# EAGLE board ModuleCarrier-xDot (EAGLE 7.7.0)
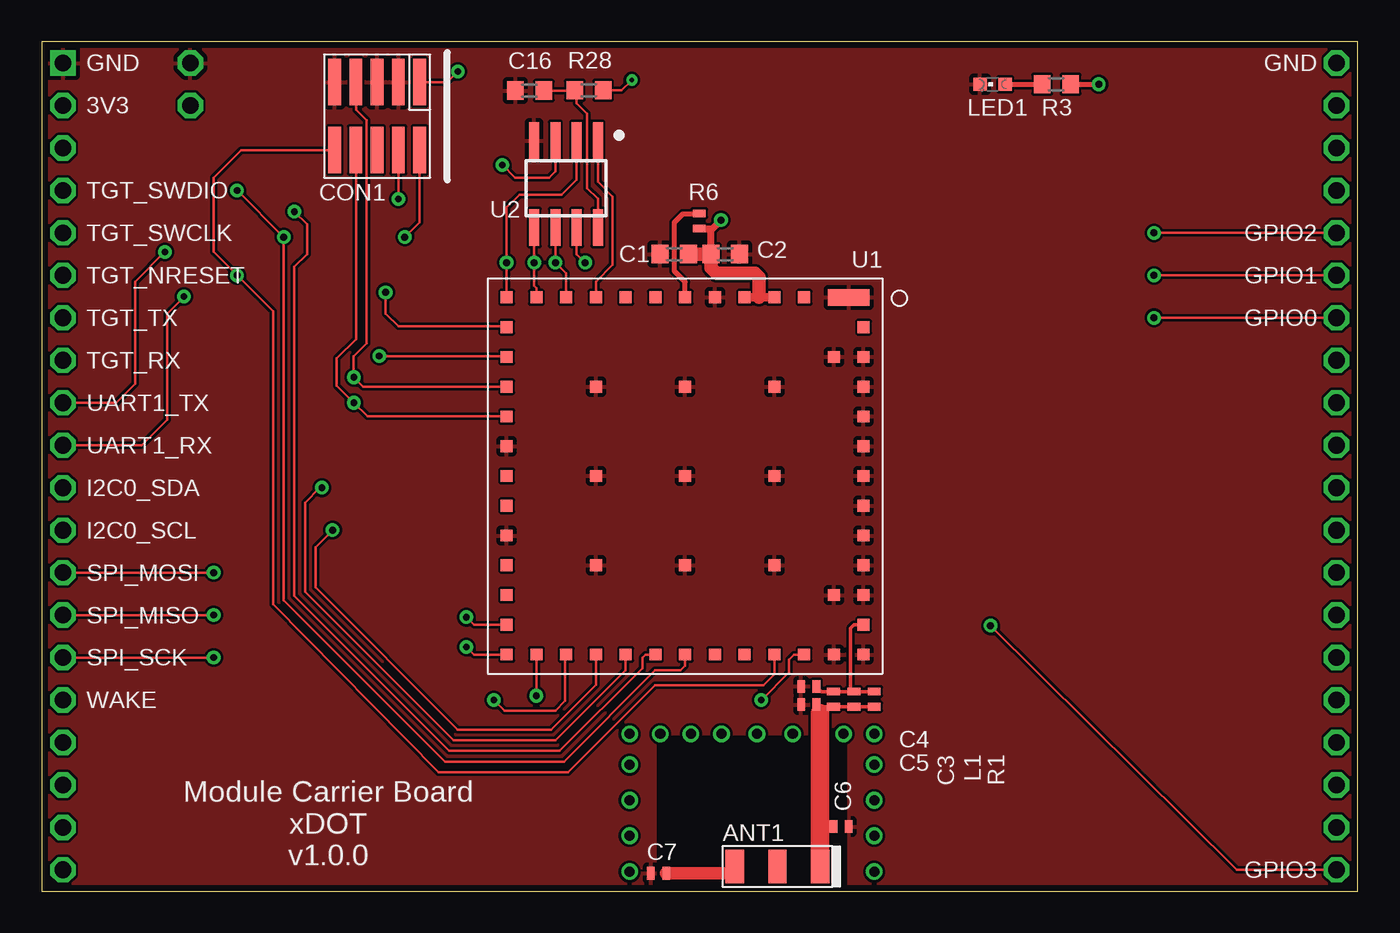
[diagram p0: board, top side]
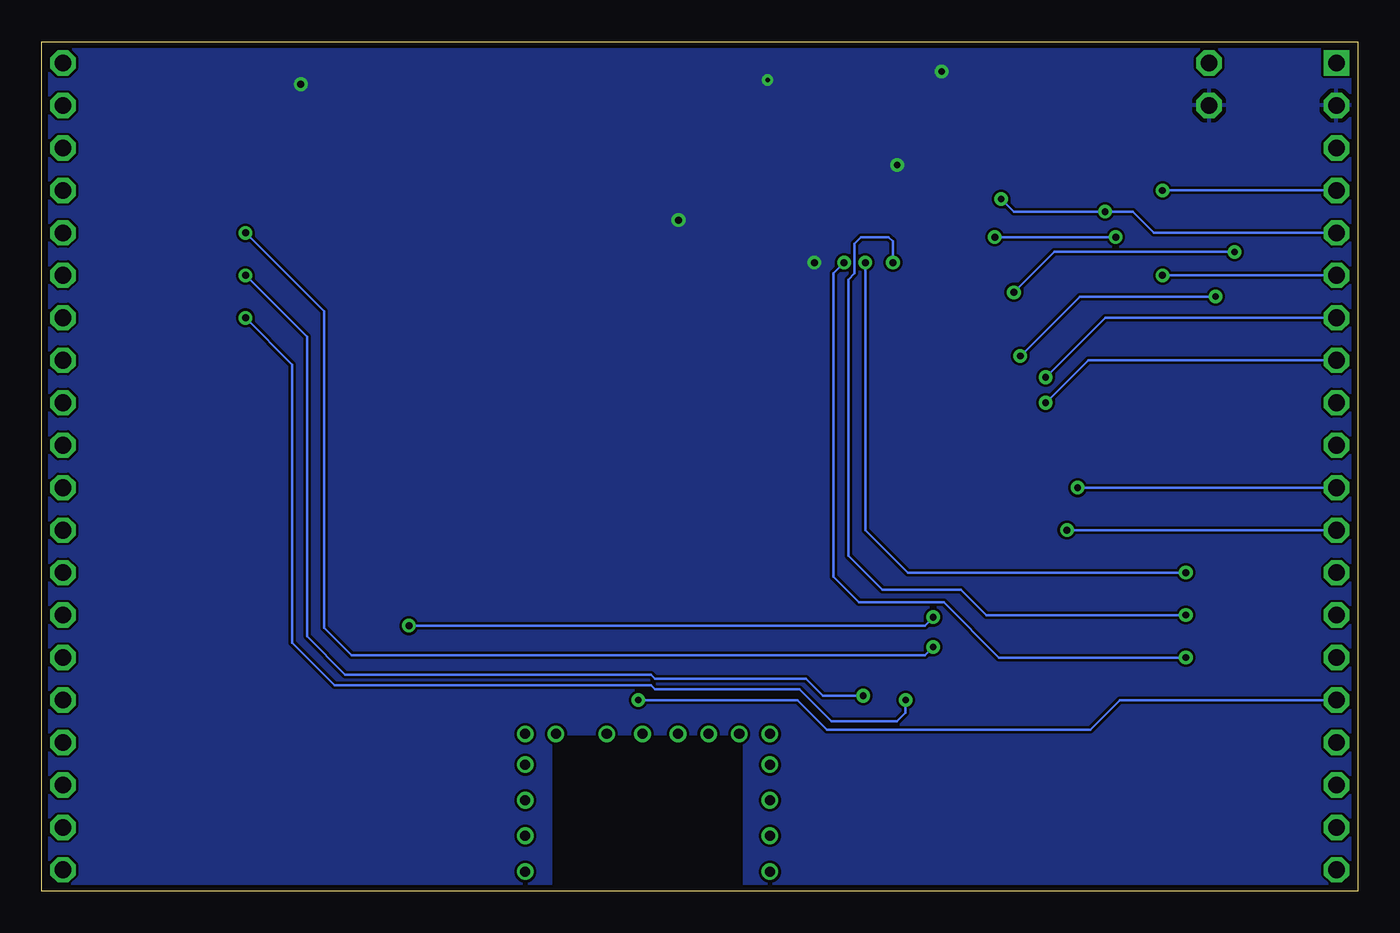
[diagram p1: board, bottom side, seen from below]

Size 78.74 x 50.8 mm. Coordinates in mm from the lower left corner, seen from the top.
Copper layers ((1*16)): Top 0.035mm / dielectric 0.8mm / Bottom 0.035mm
Design rules "mbed-HDK-6-6-2-layer": minimum track width 6mil, minimum drill 9mil, track to track 6mil, track to pad 6mil, pad to pad 6mil, via to via 6mil, smd to smd 6mil, copper to edge 15mil, drill to drill 8mil, minimum pad ring 10mil, minimum via ring 8mil, stop-mask expansion 4mil, vias tented up to drill 0mil, thermal gap 10mil
tRestrict: area 36.8,0.2 to 48.2,9.3
bRestrict: area 36.8,0.2 to 48.2,9.3

## Footprints (pad centres in the part's own frame; a part is rotated, then mirrored left to right if it is on the bottom)
M620720 = smd 1.1 x 2: P$1 -2.55,0; P$2 0,0; P$3 2.55,0
0603 = smd 1 x 1.1: 1 -0.85,0; 2 0.85,0
0402 = smd 0.457 x 0.762: 1 -0.457,0; 2 0.457,0
FTSH-105-02 = smd 0.762 x 2.794: 1 0.381,-2.032; 2 0.381,2.032; 3 1.651,-2.032; 4 1.651,2.032; 5 2.921,-2.032; 6 2.921,2.032; 7 4.191,-2.032; 8 4.191,2.032; 9 5.461,-2.032; 10 5.461,2.032
CHIPLED_0603 = smd 0.8 x 0.8: A 0,-0.75; C 0,0.75
TP50-PTH = drill 1 octagon: TP 0,0
MTXDOT-EU1/NA1-A00-1 = smd 0.97 x 2.49: P$1 0,0 | smd 0.71 x 0.71: P$2 0,-2.67; P$3 0,-4.45; P$4 0,-6.23; P$5 0,-8.01; P$6 0,-9.79; P$7 0,-11.57; P$8 0,-13.35; P$9 0,-15.13; P$10 0,-16.91; P$11 0,-18.69; P$12 0,-20.47; P$13 1.78,-20.47; P$14 3.56,-20.47; P$15 5.34,-20.47; P$16 7.12,-20.47; P$17 8.9,-20.47; P$18 10.68,-20.47; P$19 12.46,-20.47; P$20 14.24,-20.47; P$21 16.02,-20.47; P$22 17.8,-20.47; P$23 19.58,-20.47; P$24 21.36,-20.47; P$25 21.36,-18.69; P$26 21.36,-16.91; P$27 21.36,-15.13; P$28 21.36,-13.35; P$29 21.36,-11.57; P$30 21.36,-9.79; P$31 21.36,-8.01; P$32 21.36,-6.23; P$33 21.36,-4.45; P$34 21.36,-2.67; P$35 21.36,-0.89; P$36 21.36,0.89; P$37 19.58,0.89; P$38 17.8,0.89; P$39 16.02,0.89; P$40 14.24,0.89; P$41 12.46,0.89; P$42 10.68,0.89; P$43 8.9,0.89; P$44 7.12,0.89; P$45 5.34,0.89; P$46 3.56,0.89; P$47 1.78,0.89; P$48 17.8,-0.89; P$49 3.56,-0.89; P$50 5.34,-4.45; P$51 10.68,-4.45; P$52 16.02,-4.45; P$53 5.34,-9.79; P$54 10.68,-9.79; P$55 16.02,-9.79; P$56 5.34,-15.13; P$57 10.68,-15.13; P$58 16.02,-15.13
SO8 = smd 0.6 x 2.2: 1 -1.905,-2.6; 2 -0.635,-2.6; 3 0.635,-2.6; 4 1.905,-2.6; 5 1.905,2.6; 6 0.635,2.6; 7 -0.635,2.6; 8 -1.905,2.6
MODULE_DAUGHTER = drill 1 square: 1 0,0 | drill 1 octagon: 2 0,-2.54; 3 0,-5.08; 4 0,-7.62; 5 0,-10.16; 6 0,-12.7; 7 0,-15.24; 8 0,-17.78; 9 0,-20.32; 10 0,-22.86; 11 0,-25.4; 12 0,-27.94; 13 0,-30.48; 14 0,-33.02; 15 0,-35.56; 16 0,-38.1; 17 0,-40.64; 18 0,-43.18; 19 0,-45.72; 20 0,-48.26; 21 76.2,-48.26; 22 76.2,-45.72; 23 76.2,-43.18; 24 76.2,-40.64; 25 76.2,-38.1; 26 76.2,-35.56; 27 76.2,-33.02; 28 76.2,-30.48; 29 76.2,-27.94; 30 76.2,-25.4; 31 76.2,-22.86; 32 76.2,-20.32; 33 76.2,-17.78; 34 76.2,-15.24; 35 76.2,-12.7; 36 76.2,-10.16; 37 76.2,-7.62; 38 76.2,-5.08; 39 76.2,-2.54; 40 76.2,0

## Placement (x,y rotation side)
ANT1  M620720  [M620720]  44.02,1.47 180 top
C1  10uF  [0603]  37.85,38.1 180 top
C2  100nF  [0603]  40.89,38.1 0 top
C3  9.1pF  [0402]  47.37,11.48 270 top
C4  5.6pF  [0402]  45.9,12.24 0 top
C5  10pF  [0402]  45.9,11.16 0 top
C6  82pF  [0402]  47.83,3.86 180 top
C7  6.8pF  [0402]  36.91,1.07 0 top
C16  100nF  [0603]  29.18,47.88 0 top
CON1  SWD-10/TC2050_SMD  [FTSH-105-02]  22.99,46.36 180 top
L1  7.5nH  [0402]  48.59,11.48 270 top
LED1  SMD_LED0603  [CHIPLED_0603]  56.9,48.26 90 top
R1  0  [0402]  49.81,11.48 270 top
R3  1.5K  [0603]  60.71,48.26 0 top
R6  0  [0402]  39.34,40.08 90 top
R28  0  [0603]  32.74,47.9 0 top
TP1  TEST-POINT-50R-PTH  [TP50-PTH]  8.89,46.99 0 top
TP2  TEST-POINT-50R-PTH  [TP50-PTH]  8.89,49.53 0 top
U1  MTXDOT-EU1-A00-1  [MTXDOT-EU1/NA1-A00-1]  48.29,35.51 270 top
U2  MX25R3235FM1IH0  [SO8]  31.37,42.29 180 top
U$1  MODULE_DAUGHTER  [MODULE_DAUGHTER]  1.27,49.53 0 top

## Library data of the parts
ANT1 = mbed-HDK-RF; MF: Ethertronics; MFN: M620720; OC-DIGIKEY: 939-1066-1-ND
C1-C7 C16 L1 R1 R3 R6 R28 = mbed-HDK-RLCQ
CON1 = mbed-HDK-Connector
LED1 = mbed-HDK-Optical; MF: Wurth Electronics Inc; MFN: 150060RS75000; OC-DIGIKEY: 732-4978-1-ND; OC-MOUSER: 710-150060RS75000; OC-NEWARK: 2322071
TP1 TP2 = mbed-HDK
U1 = mbed-HDK-MF-MULTITECH; MF: Multi-Tech Systems Inc.; MFN: MTXDOT-EU1-A00-1; OC-DIGIKEY: 591-1292-ND
U2 = mbed-HDK-IC; MF: Macronix; MFN: MX25R3235FM2IH0; OC-DIGIKEY: 1092-1174-ND
U$1 = blackbriar

## Nets
+3.3V_TGT: C1.1 C2.1 CON1.1 R3.2 R6.1 R28.2 TP1.TP U1.P$3 U1.P$4 U2.3 U2.7 U$1.2
ANT1: C3.1 C4.2 L1.1 R1.1 U1.P$37
GND: C1.2 C2.2 C4.1 C5.1 C6.1 C7.1 C16.1 CON1.3 CON1.5 CON1.9 LED1.C TP2.TP U1.P$1 U1.P$5 U1.P$17 U1.P$20 U1.P$35 U1.P$36 U1.P$38 U1.P$39 U1.P$40 U1.P$41 U1.P$42 U1.P$43 U1.P$44 U1.P$45 U1.P$46 U1.P$48 U1.P$49 U1.P$50 U1.P$51 U1.P$52 U1.P$53 U1.P$54 U1.P$55 U1.P$56 U1.P$57 U1.P$58 U2.4 U$1.1
GPIO0: U1.P$26 U$1.34
GPIO1: U1.P$25 U$1.35
GPIO2: U1.P$24 U$1.36
GPIO3: U1.P$23 U$1.21
I2C0_SCL: U1.P$27 U$1.12
I2C0_SDA: U1.P$28 U$1.11
N$1: ANT1.P$3 C7.2
N$2: LED1.A R3.1
N$4: ANT1.P$1 C3.2 C5.2 C6.2 L1.2 R1.2
N$48: C16.2 R28.1 U2.8
RFU1: U1.P$2
RFU2: R6.2 U1.P$6
RFU3: U1.P$7
RFU4: U1.P$8
RFU5: U1.P$18
RFU6: U1.P$19
RFU7: U1.P$21
RFU8: U1.P$22
SPI_MISO: U1.P$12 U2.2 U$1.14
SPI_MOSI: U1.P$11 U2.5 U$1.13
SPI_NSS: U1.P$9 U2.1
SPI_SCK: U1.P$10 U2.6 U$1.15
TGT_NRESET: CON1.10 U1.P$33 U$1.6
TGT_RX: CON1.8 U1.P$16 U$1.8
TGT_SWCLK: CON1.4 U1.P$29 U$1.5
TGT_SWDIO: CON1.2 U1.P$30 U$1.4
TGT_TX: CON1.7 U1.P$15 U$1.7
UART1_CTS: U1.P$32
UART1_RTS: U1.P$31
UART1_RX: U1.P$14 U$1.10
UART1_TX: U1.P$13 U$1.9
WAKE: U1.P$34 U$1.16

## Tracks (layer width: path | path; a pad name or v marks a point on that pad's centre or on a via)
+3.3V_TGT  (via drill 0.25, 0.41)
  Top 0.152: R28.2 34.7,47.9 v35.31,48.51 | CON1.1 24.26,48.39 v24.89,49.02 | U2.7 32,38.1 v32.51,37.59 | U2.3 30.73,43.05 30.35,42.67 28.32,42.67 v27.56,43.43
  Top 0.305: R3.2 v63.25,48.26
  Top 0.406: R6.1 40.13,39.62 | 40.13,39.62 v40.64,40.13 | C2.1 40.04,39.54 40.13,39.62
  Top 0.508: U1.P$4 42.93,35.51 U1.P$3
  Top 0.813: C1.1 C2.1 40.04,37.3 40.39,36.96 42.67,36.96 42.93,36.7 42.93,35.51
  pour Bottom: 78.74,50.8 0,50.8 0,0 78.74,0
ANT1
  Top 0.203: R1.1 L1.1 | L1.1 C3.1 46.66,11.94 C4.2 | U1.P$37 48.59,15.93 48.39,15.72 48.39,12.14 L1.1
GND
  pour Top: 78.74,50.8 0,50.8 0,0 78.74,0
GPIO0  (via drill 0.41)
  Top 0.152: U1.P$26 31.32,14.21 31.32,11.38 30.73,10.8 27.69,10.8 v27.05,11.43 | v66.55,34.29 U$1.34
  Bottom 0.152: v27.05,11.43 27.05,10.67 27.56,10.16 31.5,10.16 33.4,12.06 42.04,12.06 42.29,12.32 61.21,12.32 63.75,14.86 63.75,31.5 v66.55,34.29
GPIO1  (via drill 0.41)
  Top 0.152: v66.55,36.83 U$1.35 | U1.P$25 v29.59,11.69 v29.59,11.68
  Bottom 0.152: v29.59,11.68 32,11.68 33.02,12.7 42.04,12.7 42.29,12.95 60.58,12.95 62.87,15.24 62.87,33.15 v66.55,36.83
GPIO2  (via drill 0.41)
  Top 0.152: U1.P$24 25.86,14.15 v25.4,14.61 | v66.55,39.37 U$1.36
  Bottom 0.152: v25.4,14.61 25.91,14.1 60.2,14.1 61.85,15.75 61.85,34.67 v66.55,39.37
GPIO3  (via drill 0.41)
  Top 0.152: U1.P$23 25.85,15.93 v25.4,16.38 | v56.77,15.88 71.5,1.27 U$1.21
  Bottom 0.152: v56.77,15.88 25.91,15.88 v25.4,16.38
I2C0_SCL  (via drill 0.41)
  Top 0.152: U1.P$27 33.16,12.33 30.48,9.65 24.89,9.65 16.38,18.16 16.38,20.57 v17.4,21.59
  Bottom 0.152: v17.4,21.59 U$1.12
I2C0_SDA  (via drill 0.41)
  Top 0.152: U1.P$28 34.94,13.22 30.73,9.02 24.64,9.02 15.75,17.91 15.75,23.24 16.64,24.13 v16.76,24.13
  Bottom 0.152: v16.76,24.13 U$1.11
N$1
  Top 0.762: C7.2 41.06,1.07 ANT1.P$3
N$2
  Top 0.305: LED1.A R3.1
N$3  (via drill 0.6)
  other vias: 49.81,1.17
N$4
  Top 0.203: R1.2 L1.2 C3.2 46.56,11.02 C5.2 46.36,10.61 46.57,10.64 | C6.2 47.32,3.81 47.17,3.81
  Top 0.508: 47.17,3.81 46.97,4.01 46.56,4.01
  Top 1.1: ANT1.P$1 46.56,1.48 46.56,4.01 46.57,10.64
N$5  (via drill 0.6)
  other vias: 49.81,3.3
N$6  (via drill 0.6)
  other vias: 49.81,5.44
N$7  (via drill 0.6)
  other vias: 49.81,7.57
N$8  (via drill 0.6)
  other vias: 49.81,9.4
N$9  (via drill 0.6)
  other vias: 47.98,9.4
N$10  (via drill 0.6)
  other vias: 44.93,9.4
N$11  (via drill 0.6)
  other vias: 42.8,9.4
N$12  (via drill 0.6)
  other vias: 40.67,9.4
N$13  (via drill 0.6)
  other vias: 38.84,9.4
N$14  (via drill 0.6)
  other vias: 37.01,9.4
N$15  (via drill 0.6)
  other vias: 35.18,9.4
N$16  (via drill 0.6)
  other vias: 35.18,7.57
N$17  (via drill 0.6)
  other vias: 35.18,5.44
N$18  (via drill 0.6)
  other vias: 35.18,3.3
N$19  (via drill 0.6)
  other vias: 35.18,1.17
N$48
  Top 0.152: C16.2 31.86,47.88 R28.1 32,47.79 32,47.12 32.64,46.48 32.64,42.04 33.27,41.4 U2.8
RFU2
  Top 0.305: U1.P$6 38.5,36.44 37.85,37.08 37.85,40.01 38.35,40.51 39.32,40.51 R6.2
SPI_MISO  (via drill 0.41)
  Top 0.152: U1.P$12 v27.82,37.59 v27.81,37.59 v27.82,37.59 27.82,40.9 28.57,41.66 31.11,41.66 32,42.55 U2.2 | v10.29,16.51 U$1.14
  Bottom 0.152: v27.81,37.59 v27.82,37.59 27.82,38.86 28.07,39.12 29.72,39.12 30.1,38.73 30.1,36.96 30.48,36.58 30.48,20.07 28.45,18.03 23.75,18.03 22.22,16.51 v10.29,16.51
SPI_MOSI  (via drill 0.41)
  Top 0.152: U1.P$11 29.59,36.06 29.46,36.2 v29.46,37.59 U2.5 | v10.29,19.05 U$1.13
  Bottom 0.152: v29.46,37.59 29.46,21.59 26.92,19.05 v10.29,19.05
SPI_NSS
  Top 0.152: U1.P$9 33.16,36.46 34.16,37.47 34.16,41.53 33.27,42.42 U2.1
SPI_SCK  (via drill 0.41)
  Top 0.152: U1.P$10 31.38,36.95 v30.73,37.59 U2.6 | v10.29,13.97 U$1.15
  Bottom 0.152: v30.73,37.59 31.37,36.96 31.37,18.8 29.84,17.27 24.77,17.27 21.46,13.97 v10.29,13.97
TGT_NRESET  (via drill 0.41)
  Top 0.152: U1.P$33 43.84,12.97 43.18,12.32 36.7,12.32 31.5,7.11 23.75,7.11 13.84,17.15 13.84,34.67 v11.68,36.83 10.29,38.23 10.29,42.67 11.94,44.32 CON1.10
  Bottom 0.152: v11.68,36.83 U$1.6
TGT_RX  (via drill 0.41)
  Top 0.152: U1.P$16 19.49,28.39 v18.67,29.21 17.65,30.23 17.65,31.88 18.8,33.02 CON1.8
  Bottom 0.152: U$1.8 16.13,31.75 v18.67,29.21
TGT_SWCLK  (via drill 0.41)
  Top 0.152: v15.11,40.64 15.88,39.88 15.88,38.1 15.11,37.34 15.11,17.65 24.38,8.38 30.99,8.38 35.94,13.34 35.94,13.97 36.12,14.15 U1.P$29 | v21.34,41.4 CON1.4
  Bottom 0.152: U$1.5 12.19,39.37 13.46,40.64 v15.11,40.64 20.57,40.64 v21.34,41.4
TGT_SWDIO  (via drill 0.41)
  Top 0.152: U1.P$30 38.5,13.48 38.23,13.21 36.7,13.21 31.24,7.75 24.13,7.75 14.48,17.4 v14.48,39.12 v11.68,41.91 | CON1.2 22.61,40.01 v21.72,39.12
  Bottom 0.152: v11.68,41.91 U$1.4 | v14.48,39.12 v21.72,39.12
TGT_TX  (via drill 0.41)
  Top 0.152: U1.P$15 19.23,30.17 v18.67,30.73 18.67,32 19.43,32.77 19.43,46.1 18.8,46.74 CON1.7
  Bottom 0.152: U$1.7 15.11,34.29 v18.67,30.73
UART1_RX  (via drill 0.41)
  Top 0.152: U$1.10 5.97,26.67 7.49,28.19 7.49,34.54 v8.51,35.56 | v20.19,32 27.76,32 U1.P$14
  Bottom 0.152: v8.51,35.56 16.64,35.56 v20.19,32
UART1_TX  (via drill 0.41)
  Top 0.152: U$1.9 4.45,29.21 5.59,30.35 5.59,36.45 v7.37,38.23 | v20.57,35.81 20.57,34.54 21.34,33.78 27.76,33.78 U1.P$13
  Bottom 0.152: v7.37,38.23 18.16,38.23 v20.57,35.81
WAKE  (via drill 0.41)
  Top 0.152: U1.P$34 45.01,14.15 44.7,13.84 44.7,13.08 v43.05,11.43
  Bottom 0.152: v43.05,11.43 33.53,11.43 31.75,9.65 16,9.65 14.22,11.43 U$1.16

## Text on the board
tPlace: GND / 3V3 / / TGT_SWDIO / TGT_SWCLK / TGT_NRESET / TGT_TX / TGT_RX / UART1_TX / UART1_RX / I2C0_SDA / I2C0_SCL / SPI_MOSI / SPI_MISO / SPI_SCK / WAKE | GND / / / / GPIO2 / GPIO1 / GPIO0 / / / / / / / / / / / / / GPIO3 | Module Carrier Board / xDOT / v1.0.0